# Altium PCB USB_FPC_Up.PcbDoc
Units mil, origin at the board's own origin, x right, y up, seen from the top; angles counter-clockwise.
Board outline 540 x 565 mil, 2 copper layers (Top Layer, Bottom Layer); 2 components, 4 nets, 12 pads, 0 vias.
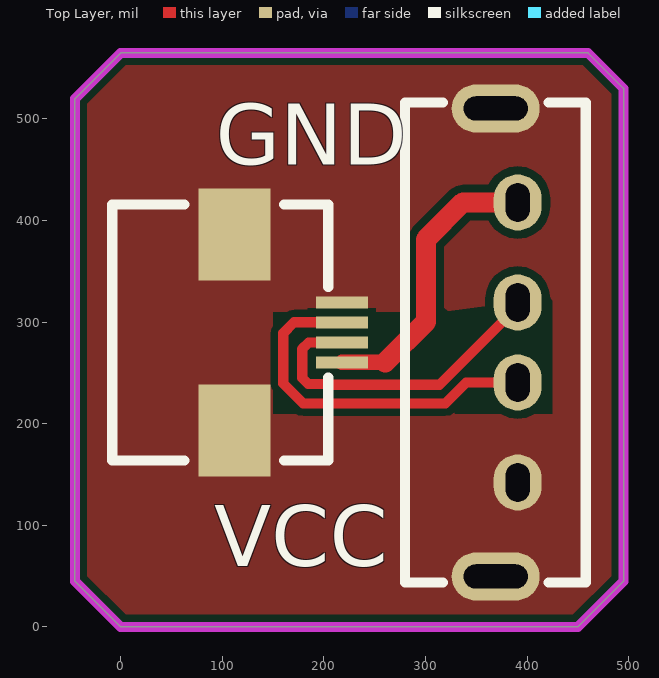
[diagram p0: Top Layer view]
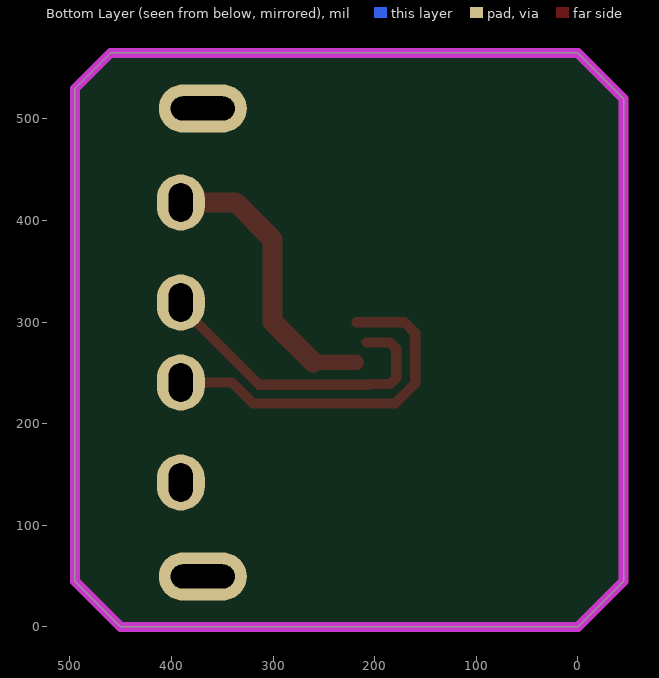
[diagram p1: Bottom Layer view, seen from below]

## Layer stack, top to bottom
Top Solder: solder mask 0.4, Solder Resist, Dk 3.5
Top Layer: signal copper 1.4
Dielectric 1: dielectric 12.6, FR-4, Dk 4.8
Bottom Layer: signal copper 1.4
Bottom Solder: solder mask 0.4, Solder Resist, Dk 3.5

## Board outline
-45,45 0,0 450,0 495,45 495,530 460,565 0,565 -45,520

## Design rules (kind name [scope] priority, off if disabled: settings)
Clearance [All] p1: gap=7.87 ignorepadtopadclearanceinfootprint=FALSE except(0: Arc-Hole Track-Hole SMDPad-Hole THPad-Hole Via-Hole Fill-Hole Poly-Hole Region-Hole Text-Hole; 3.94: Arc-SMDPad Track-SMDPad SMDPad-SMDPad; 7.09: Arc-Arc Arc-Track Arc-THPad Arc-Via Arc-Fill Arc-Poly Arc-Region Arc-Text Track-Track Track-THPad Track-Via Track-Fill Track-Poly Track-Region Track-Text; 19.68: THPad-THPad THPad-Via Via-Via)
HoleToHoleClearance [All] p1: gap=12 allowstackedmicrovias=TRUE
MinimumSolderMaskSliver [All] p1: minsoldermaskwidth=3.9
PasteMaskExpansion [All] p1: expansion=1.97
PlaneClearance [All] p1: clearance=10
PlaneConnect [All] p1: planeconnectstyle=Direct reliefexpansion=20 reliefentries=4 reliefconductorwidth=10 reliefairgap=10
PolygonConnect [All] p1: connectstyle=Direct reliefconductorwidth=10 reliefentries=4 polygonreliefangle="90 Angle" airgapwidth=10
RoutingVias [All] p1: holewidth=23.62 width=47.24 viastyle="Through Hole" minholewidth=23.62 minwidth=47.24 maxholewidth=23.62 maxwidth=47.24
SilkToSilkClearance [All] p1: silktosilkclearance=2
SilkToSolderMaskClearance [IsPad] p1: minsilkscreentomaskgap=4 clearancetoexposedcopper=TRUE
SolderMaskExpansion [All] p1: expansion=3.94 istentingtop=FALSE
UnRoutedNet [All] p1: checkbadconnections=TRUE
Width PWR_idth [InNetClass('PWR')] p1: maxlimit=20 minlimit=15 preferedwidth=20 minimp=50.000000 maximp=50.000000 favimp=50.000000
Width [All] p2: maxlimit=10 minlimit=10 preferedwidth=10
22 further rules are at their usual default settings.

## Classes and differential pairs
net class PWR: GND VCC

## Components (designator, comment, footprint, x,y, rotation, side; value= is the part's Value field where it differs from the comment)
GND "U-G-04DD-W-4" USB-TH_U-G-04DD-W-4 380,280 r270 top (schematic designator J1)
VCC "AFC01-S04FCC-00" FFC-SMD_4P-P0.50_AFC01-S04FCC-00 165,290 r270 top (schematic designator J2)

## Footprints (in the part's own frame and the unit in brackets; to place one, negate y for a bottom-side part, rotate by r counter-clockwise, add the part's x,y. Pads: shape width x height; smd on the part's side, far side on the other; paste and mask are expansions set on the pad)
FFC-SMD_4P-P0.50_AFC01-S04FCC-00 [mm]
  rect 0.3x1.3 smd paste+0 mask+0.05: 1(-0.75,1.34) 2(-0.25,1.34) 3(0.25,1.34) 4(0.75,1.34)
  rect 2.3x1.8 smd: 5(2.45,-1.34) 6(-2.45,-1.34)
  silkscreen extent -3.2,-4.4 3.2,1
USB-TH_U-G-04DD-W-4 [mm]
  oval 1.4x1.2 hole 0.6 slot 0.96 at 0 deg: 1(-3.5,0.275) 2(-1,0.275) 3(1,0.275) 4(3.5,0.275)
  oval 1.2x2.2 hole 0.6 slot 1.6 at 90 deg: 5(-5.85,-0.275) 6(5.85,-0.275)
  silkscreen extent -6,-2.54 6,1.98

## Part data
GND: library part "USB U-G-04DD-W-4", "直插式USB-A公头", Current Rating - Power (Max)=-, JLCPCB Part Class="Extended Part", LCSC Part Name="Type-A 公 直插", Manufacturer=韩国韩荣, Operating Temperature Range=-55℃~+85℃, Add into BOM=yes, Connector Type=Type-A, Convert to PCB=yes, Datasheet=https://atta.szlcsc.com/upload/public/pdf/source/20210810/0A35F1E9B38E7EA5C3EF6C12E1E2A06B.pdf, Device=U-G-04DD-W-4, Gender=公, Manufacturer Part=U-G-04DD-W-4, Mounting Style=直插, Number of Contacts=4P, Number of Ports=1, Standard="USB 2.0", Supplier=LCSC, Supplier Footprint=插件, Supplier Part=C879731, Symbol=U-G-04DD-W-4
VCC: library part "FPC AFC01-S04FCC-00", "4pin FPC接口", JLCPCB Part Class="Extended Part", LCSC Part Name="间距:0.5mm P数:4P 翻盖式 下接", Manufacturer=JS(钜硕电子), Add into BOM=yes, Contact Type=下接, Convert to PCB=yes, Datasheet=https://atta.szlcsc.com/upload/public/pdf/source/20190816/C413942_2A72D1AC756EAE17EEDF756A339D4500.pdf, Device=AFC01-S04FCC-00, FFC, FCB Thickness=0.3mm, Height Above Board=2mm, Locking Feature=翻盖式, Manufacturer Part=AFC01-S04FCC-00, Mounting Type=卧贴, Number of Contacts=4P, Pitch=0.5mm, Supplier=LCSC, Supplier Footprint=SMD,P=0.5mm,卧贴, Supplier Part=C262260, Symbol=AFC01-S04FCC-00

## Nets (pads, with @x,y where several pads share a name; then routed paths per layer and width w, separated by ;. In a path a pad name is that pad's centre, name@x,y a point inside that pad or via, vN(x,y) a via of type N, cw(c..) or ccw(c..) an arc to the next point about the centre after c; other vN are vias at no path point)
D+: GND.3 VCC.2 | length 359.2
  Top Layer w10: VCC.2 170.68,299.84 160,289.16 160,239.58 179.58,220 319.56,220 340.19,240.63 GND.3
D-: GND.2 VCC.3 | length 311.1
  Top Layer w10: VCC.3@207.73,280.16 207.57,280 185,280 178.69,273.69 178.69,245.05 184.55,239.19 205.81,239.19 206.61,238.39 313.79,238.39 390.83,315.43 GND.2
GND: GND.4 GND.5 GND.6 VCC.1 VCC.5 VCC.6
VCC: GND.1 VCC.4 | length 285.6
  Top Layer w15: VCC.4 260.48,260.47
  Top Layer w20: 260.48,260.47 300.54,300.54 300.54,381.41 336.93,417.8 GND.1

## Polygon pours and split planes (outlines as drawn)
GND on Top Layer "GND_L01_P000" (solid, pour order 0): -45,45 0,0 450,0 495,45 495,530 460,565 0,565 -45,520

## Keep-outs
Keep-Out Layer:
  the board outline again, w10

## Other copper
Top Layer:
  pour cut-out: 422.59,323.3 425,320.9 425,210 329.56,210 315,224.56 315,310
  pour cut-out: 150,310 315,310 315,210 150,210